# EAGLE board CEAZA_MEGA_V1.6 (EAGLE 9.5.2), part 1 of 2
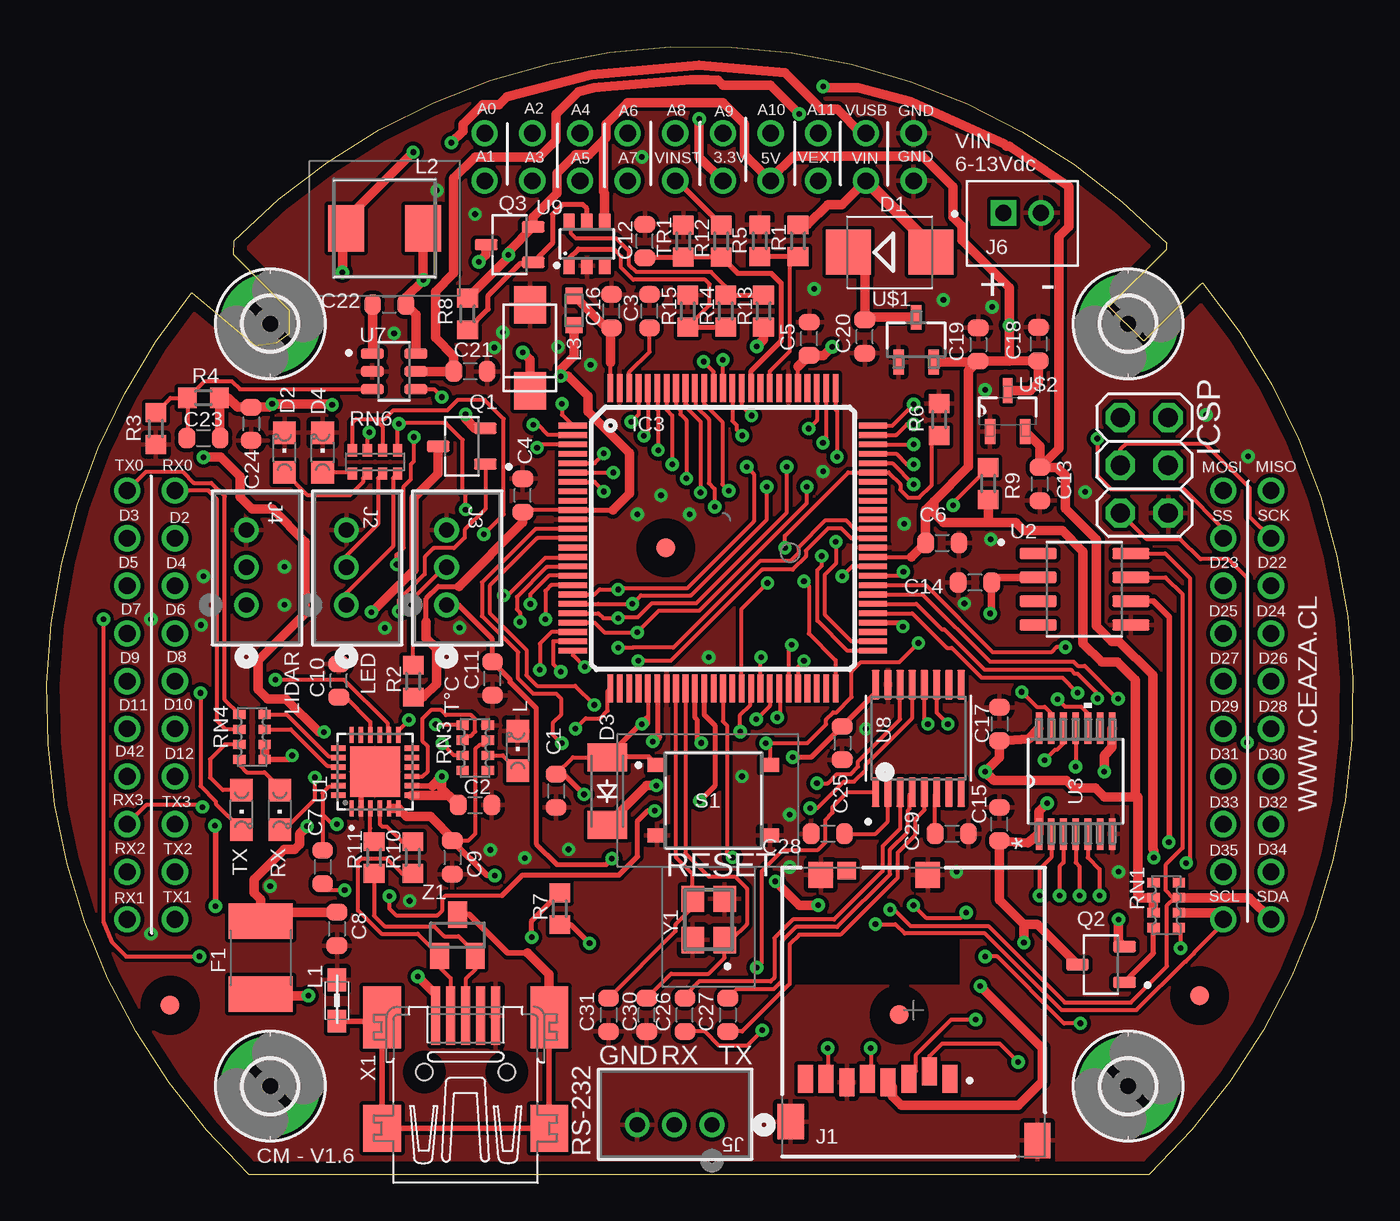
[diagram p0: board, top side]
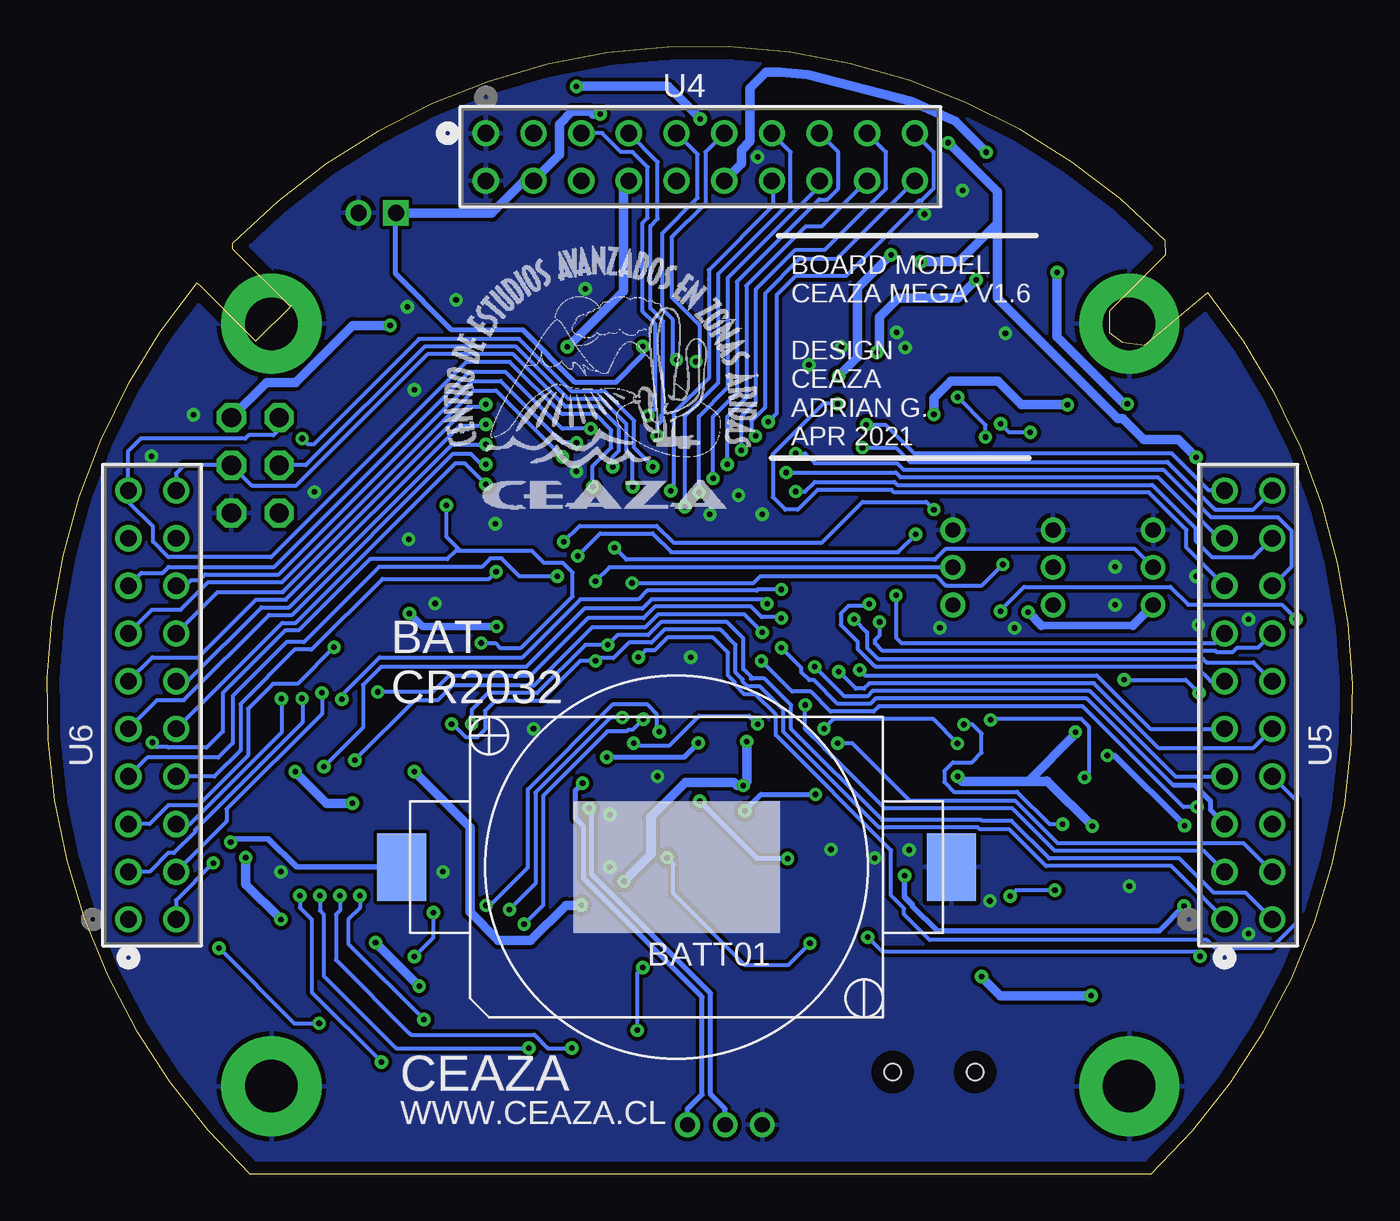
[diagram p1: board, bottom side, seen from below]

Size 69.59 x 60.07 mm. Coordinates in mm from the lower left corner, seen from the top.
Outline: 10.76,0 58.76,0 arc86 61.61,47.48 61.47,47.4 58.46,44.39 56.55,46.3 56.63,46.26 59.68,49.31 59.68,49.62 arc91 9.97,49.75 9.96,49 12.93,46.03 12.93,44.81 12.24,44.32 11.1,44.16 7.71,46.98 arc85 10.76,0
Copper layers (1*16): Top 0.035mm / dielectric 1.5mm / Bottom 0.035mm
Design rules "default *": minimum track width 8mil, minimum drill 16mil, track to track 7mil, track to pad 7mil, pad to pad 8mil, via to via 10mil, smd to smd 7mil, copper to edge 27mil, drill to drill 12mil, minimum pad ring 10mil, minimum via ring 8mil, stop-mask expansion 2mil, vias tented up to drill 24mil, thermal gap 10mil
Net classes: 0 default: width 0.203 mm, drill 0.406 mm, clearance 0.203 mm; 1 power: width 0.508 mm, drill 0.406 mm, clearance 0.203 mm; 2 gnd: width 0.305 mm, drill 0.406 mm, clearance 0.203 mm; 3 power usb: width 0.508 mm, drill 0.406 mm, clearance 0.203 mm

## Footprints (pad centres in the part's own frame; a part is rotated, then mirrored left to right if it is on the bottom)
KZH20SMD = smd 2.6 x 3.6: + 14.65,0; - -14.65,0
C0603-ROUND = smd 0.898 x 1.1: 1 -0.889,0; 2 0.889,0
SMB = smd 2.4 x 2.4: A 2.2,0; C -2.2,0
CHIPLED_0805 = smd 1.2 x 1.2: A 0,-1.05; C 0,1.05
SOD-123_MINI-SMA = smd 1.5 x 2.1: A 1.8,0; C -1.8,0
L1812 = smd 1.9 x 3.4: 1 -1.95,0; 2 1.95,0
FIDUCIA-MOUNT = smd 1.016 x 1.016: P$1 0,0
2,8-PAD = drill 2.8 pad 5.334: B2,8 0,0
TQFP100 = smd 1.5 x 0.3: 1 -8,6; 2 -8,5.5; 3 -8,5; 4 -8,4.5; 5 -8,4; 6 -8,3.5; 7 -8,3; 8 -8,2.5; 9 -8,2; 10 -8,1.5; 11 -8,1; 12 -8,0.5; 13 -8,0; 14 -8,-0.5; 15 -8,-1; 16 -8,-1.5; 17 -8,-2; 18 -8,-2.5; 19 -8,-3; 20 -8,-3.5; 21 -8,-4; 22 -8,-4.5; 23 -8,-5; 24 -8,-5.5; 25 -8,-6; 51 8,-6; 52 8,-5.5; 53 8,-5; 54 8,-4.5; 55 8,-4; 56 8,-3.5; 57 8,-3; 58 8,-2.5; 59 8,-2; 60 8,-1.5; 61 8,-1; 62 8,-0.5; 63 8,0; 64 8,0.5; 65 8,1; 66 8,1.5; 67 8,2; 68 8,2.5; 69 8,3; 70 8,3.5; 71 8,4; 72 8,4.5; 73 8,5; 74 8,5.5; 75 8,6 | smd 0.3 x 1.5: 26 -6,-8; 27 -5.5,-8; 28 -5,-8; 29 -4.5,-8; 30 -4,-8; 31 -3.5,-8; 32 -3,-8; 33 -2.5,-8; 34 -2,-8; 35 -1.5,-8; 36 -1,-8; 37 -0.5,-8; 38 0,-8; 39 0.5,-8; 40 1,-8; 41 1.5,-8; 42 2,-8; 43 2.5,-8; 44 3,-8; 45 3.5,-8; 46 4,-8; 47 4.5,-8; 48 5,-8; 49 5.5,-8; 50 6,-8; 76 6,8; 77 5.5,8; 78 5,8; 79 4.5,8; 80 4,8; 81 3.5,8; 82 3,8; 83 2.5,8; 84 2,8; 85 1.5,8; 86 1,8; 87 0.5,8; 88 0,8; 89 -0.5,8; 90 -1,8; 91 -1.5,8; 92 -2,8; 93 -2.5,8; 94 -3,8; 95 -3.5,8; 96 -4,8; 97 -4.5,8; 98 -5,8; 99 -5.5,8; 100 -6,8
2X03 = drill 1.016 pad 1.55 octagon: 1 -2.54,-1.27; 2 -2.54,1.27; 3 0,-1.27; 4 0,1.27; 5 2.54,-1.27; 6 2.54,1.27
GCT_MEM2051-00-195-00-A_REVC = smd 0.8 x 1.5: 1 1.94,-3.66; 2 0.84,-3.26; 3 -0.26,-3.66; 4 -1.36,-3.86; 5 -2.46,-3.66; 6 -3.56,-3.86; 7 -4.66,-3.66; 8 -5.76,-3.66 | smd 1 x 0.95: 9 -3.56,7.425 | smd 1.3 x 1.4: 10 -4.95,7.2; 11 0.75,7.2 | smd 1.4 x 1.9: 12 -6.55,-5.95; 13 6.6,-6.95
CONN_B3B-PH-K-S(LF)(SN)_JST = drill 0.813 pad 1.321: 1 0,0; 2 -2.007,0; 3 -3.988,0
JST_B2B-PH-K-S(LF)(SN) = drill 0.86 square: 1 1,-0.55 | drill 0.86: 2 -1,-0.55
0805 = smd 1.2 x 1: 1 -1.1,0; 2 1.1,0
MWSA0503 = smd 1.9 x 2.5: 1 -2.05,0; 2 2.05,0
INDC1608X90N = smd 0.87 x 0.93: 1 -0.78,0; 2 0.78,0
SOT95P280X125-3N = smd 1.21 x 0.59: 1 -1.255,0.95; 2 -1.255,-0.95; 3 1.255,0
R0603 = smd 1 x 1.1: 1 -0.85,0; 2 0.85,0
CAY16 = smd 0.5 x 0.65: 1 -1.2,-0.675; 2 -0.4,-0.675; 3 0.4,-0.675; 4 1.2,-0.675; 5 1.2,0.675; 6 0.4,0.675; 7 -0.4,0.675; 8 -1.2,0.675
0603-ARV = smd 0.5 x 0.65: 1 -1.2,-0.625; 2 -0.4,-0.625; 3 0.4,-0.625; 4 1.2,-0.625; 5 1.2,0.625; 6 0.4,0.625; 7 -0.4,0.625; 8 -1.2,0.625
TS1187ACGB = smd 1 x 0.75: A1 -3,1.875; B1 3,1.875; C1 -3,-1.875; D1 3,-1.875
QFN50P400X400X80-25N = smd 0.81 x 0.26: 1 -1.955,1.25; 2 -1.955,0.75; 3 -1.955,0.25; 4 -1.955,-0.25; 5 -1.955,-0.75; 6 -1.955,-1.25; 13 1.955,-1.25; 14 1.955,-0.75; 15 1.955,-0.25; 16 1.955,0.25; 17 1.955,0.75; 18 1.955,1.25 | smd 0.26 x 0.81: 7 -1.25,-1.955; 8 -0.75,-1.955; 9 -0.25,-1.955; 10 0.25,-1.955; 11 0.75,-1.955; 12 1.25,-1.955; 19 1.25,1.955; 20 0.75,1.955; 21 0.25,1.955; 22 -0.25,1.955; 23 -0.75,1.955; 24 -1.25,1.955 | smd 2.68 x 2.68: 25 0,0
SOIC127P600X175-8N = smd 1.97 x 0.59: 1 -2.475,1.905; 2 -2.475,0.635; 3 -2.475,-0.635; 4 -2.475,-1.905; 5 2.475,-1.905; 6 2.475,-0.635; 7 2.475,0.635; 8 2.475,1.905
PW14 = smd 1.676 x 0.356: 1 -2.819,1.95; 2 -2.819,1.3; 3 -2.819,0.65; 4 -2.819,0; 5 -2.819,-0.65; 6 -2.819,-1.3; 7 -2.819,-1.95; 8 2.819,-1.95; 9 2.819,-1.3; 10 2.819,-0.65; 11 2.819,0; 12 2.819,0.65; 13 2.819,1.3; 14 2.819,1.95
1-215307-0 = drill 0.889 pad 1.397: 1 -22.86,2.54; 2 -20.32,2.54; 3 -17.78,2.54; 4 -15.24,2.54; 5 -12.7,2.54; 6 -10.16,2.54; 7 -7.62,2.54; 8 -5.08,2.54; 9 -2.54,2.54; 10 0,2.54; 11 0,0; 12 -2.54,0; 13 -5.08,0; 14 -7.62,0; 15 -10.16,0; 16 -12.7,0; 17 -15.24,0; 18 -17.78,0; 19 -20.32,0; 20 -22.86,0
SOT95P275X110-6N = smd 1.24 x 0.55: 1 -1.16,0.95; 2 -1.16,0; 3 -1.16,-0.95; 4 1.16,-0.95; 5 1.16,0; 6 1.16,0.95
SOP65P640X120-16N = smd 1.57 x 0.41: 1 -2.87,2.275; 2 -2.87,1.625; 3 -2.87,0.975; 4 -2.87,0.325; 5 -2.87,-0.325; 6 -2.87,-0.975; 7 -2.87,-1.625; 8 -2.87,-2.275; 9 2.87,-2.275; 10 2.87,-1.625; 11 2.87,-0.975; 12 2.87,-0.325; 13 2.87,0.325; 14 2.87,0.975; 15 2.87,1.625; 16 2.87,2.275
SOT23-6 = smd 0.6 x 0.9: 1 -0.95,-1.15; 2 0,-1.15; 3 0.95,-1.15; 4 0.95,1.15; 5 0,1.15; 6 -0.95,1.15
SOT95P255X145-3N = smd 0.559 x 1.321: 1 -0.94,-1.194; 2 0.94,-1.194; 3 0,1.194
SOT95P237X112-3N = smd 1.321 x 0.559: 1 -1.092,0.94; 2 -1.092,-0.94 | smd 1.321 x 0.508: 3 1.092,0
SMA-SS34 = smd 2 x 1.7: 1 0,-1.4; 2 4.6,-1.4
32005-201 = smd 3.1 x 0.5: 1 3,1.6; 2 3,0.8; 3 3,0; 4 3,-0.8; 5 3,-1.6 | smd 2.5 x 2: M1 -3,-4.45; M2 -3,4.45 | smd 3.3 x 2: M3 2.9,4.45; M4 2.9,-4.45 | hole 0.9: 0,2.2; 0,-2.2
X322516MLB4SI = smd 1.4 x 1.2: 1 -1.1,-0.85; 2 1.1,-0.85; 3 1.1,0.85; 4 -1.1,0.85
SOT23 = smd 1 x 1.4: 1 -0.95,-1.1; 2 0.95,-1.1; 3 0,1.1

## Placement (x,y rotation side)
BATT01  2032  [KZH20SMD]  36.03,16.36 180 bottom
C1  22p  [C0603-ROUND]  27.14,20.43 270 top
C2  100nF  [C0603-ROUND]  22.82,19.67 0 top
C3  100nF  [C0603-ROUND]  32.12,45.99 90 top
C4  100nF  [C0603-ROUND]  25.36,36.18 90 top
C5  100nF  [C0603-ROUND]  40.63,44.52 90 top
C6  100nF  [C0603-ROUND]  47.71,33.64 0 top
C7  100nF  [C0603-ROUND]  14.69,16.36 270 top
C8  100nF  [C0603-ROUND]  15.46,13.06 270 top
C9  100nF  [C0603-ROUND]  21.6,16.87 270 top
C10  100nF  [C0603-ROUND]  15.56,26.3 90 top
C11  100nF  [C0603-ROUND]  23.75,26.41 90 top
C12  100nF  [C0603-ROUND]  31.86,49.73 90 top
C13  1uF  [C0603-ROUND]  52.92,36.77 90 top
C14  100nF  [C0603-ROUND]  49.45,31.53 180 top
C15  100nF  [C0603-ROUND]  50.76,18.65 90 top
C16  100nF  [C0603-ROUND]  30.09,45.99 90 top
C17  100nF  [C0603-ROUND]  50.76,23.98 270 top
C18  1uF  [C0603-ROUND]  52.85,44.24 270 top
C19  1uF  [C0603-ROUND]  49.63,44.22 270 top
C20  1uF  [C0603-ROUND]  43.59,44.63 90 top
C21  4.7uF  [C0603-ROUND]  22.57,42.78 0 top
C22  100nF  [C0603-ROUND]  18.25,46.34 0 top
C23  33pF  [C0603-ROUND]  8.34,39.22 0 top
C24  10uF  [C0603-ROUND]  10.88,39.99 270 top
C25  100nF  [C0603-ROUND]  42.38,22.97 270 top
C26  100nF  [C0603-ROUND]  34,8.49 90 top
C27  100nF  [C0603-ROUND]  36.28,8.49 270 top
C28  100nF  [C0603-ROUND]  41.62,18.14 180 top
C29  100nF  [C0603-ROUND]  48.22,18.14 0 top
C30  22pF  [C0603-ROUND]  31.97,8.49 90 top
C31  22pF  [C0603-ROUND]  29.93,8.49 270 top
D1  M7  [SMB]  44.92,49.13 0 top
D2  Green  [CHIPLED_0805]  12.66,38.46 0 top
D3  1N4148W  [SOD-123_MINI-SMA]  29.86,20.41 90 top
D4  Red  [CHIPLED_0805]  14.69,38.46 0 top
F1  MF-MSMF050-2 500mA  [L1812]  11.39,11.54 270 top
FD1  FIDUCIALMOUNT  [FIDUCIA-MOUNT]  61.43,9.51 0 top
FD2  FIDUCIALMOUNT  [FIDUCIA-MOUNT]  6.57,9 0 top
FD3  FIDUCIALMOUNT  [FIDUCIA-MOUNT]  45.43,8.49 0 top
FD4  FIDUCIALMOUNT  [FIDUCIA-MOUNT]  32.98,33.38 0 top
H5  MOUNT-PAD-ROUND2.8  [2,8-PAD]  57.62,45.32 0 top
H6  MOUNT-PAD-ROUND2.8  [2,8-PAD]  11.9,45.32 0 top
H7  MOUNT-PAD-ROUND2.8  [2,8-PAD]  11.9,4.68 0 top
H8  MOUNT-PAD-ROUND2.8  [2,8-PAD]  57.62,4.68 0 top
IC3  ATMEGA2560-15AU  [TQFP100]  36.03,33.89 0 top
ICSP  ICSP  [2X03]  58.48,37.78 270 top
J1  MEM2051-00-195-00-A_REVC  [GCT_MEM2051-00-195-00-A_REVC]  46.19,8.74 0 top
J2  B3B-PH-K-S(LF)(SN)  [CONN_B3B-PH-K-S(LF)(SN)_JST]  15.96,30.33 270 top
J3  B3B-PH-K-S(LF)(SN)  [CONN_B3B-PH-K-S(LF)(SN)_JST]  21.3,30.33 270 top
J4  B3B-PH-K-S(LF)(SN)  [CONN_B3B-PH-K-S(LF)(SN)_JST]  10.63,30.33 270 top
J5  B3B-PH-K-S(LF)(SN)  [CONN_B3B-PH-K-S(LF)(SN)_JST]  35.45,2.62 0 top
J6  B2B-PH-K-S(LF)(SN)  [JST_B2B-PH-K-S(LF)(SN)]  51.98,50.68 180 top
L  Yellow  [CHIPLED_0805]  25.1,22.56 0 top
L1  MH2029-300Y  [0805]  15.46,9.25 270 top
L2  MWSA0503-4R7MT  [MWSA0503]  18,50.4 180 top
L3  10uH  [INDC1608X90N]  28.09,46.03 270 top
Q1  AO3407A  [SOT95P280X125-3N]  22.11,38.79 180 top
Q2  AO3407A  [SOT95P280X125-3N]  56.17,11.17 180 top
Q3  AO3407A  [SOT95P280X125-3N]  24.66,49.54 180 top
R1  1M  [R0603]  40.03,49.74 270 top
R2  4.7k  [R0603]  19.52,26.27 270 top
R3  22K  [R0603]  5.8,39.73 270 top
R4  120K  [R0603]  8.34,41.37 0 top
R5  470K  [R0603]  37.99,49.74 90 top
R6  1k  [R0603]  47.55,40.21 270 top
R7  10K  [R0603]  27.33,14.14 90 top
R8  1M  [R0603]  22.42,45.84 90 top
R9  10K  [R0603]  50.17,36.8 270 top
R10  22R  [R0603]  19.5,16.87 90 top
R11  22R  [R0603]  17.44,16.87 90 top
R12  10k  [R0603]  35.94,49.73 270 top
R13  1M  [R0603]  38.19,45.99 270 top
R14  100K  [R0603]  36.17,45.99 90 top
R15  270K  [R0603]  34.15,45.99 270 top
RN1  10k  [CAY16]  59.65,14.33 90 top
RN3  4.7K  [CAY16]  22.82,22.71 90 top
RN4  1K  [CAY16]  10.94,23.3 270 top
RN6  1K  [0603-ARV]  17.49,37.95 180 top
RX  Blue  [CHIPLED_0805]  12.41,19.41 180 top
S1  TS-1187A-C-G-B  [TS1187ACGB]  35.52,19.92 0 top
TR1  [R0603]  33.92,49.73 90 top
TX  Orange  [CHIPLED_0805]  10.38,19.41 180 top
U1  CP2104-F03-GM  [QFN50P400X400X80-25N]  17.49,21.44 90 top
U2  DS3231MZ+  [SOIC127P600X175-8N]  55.3,31.17 0 top
U3  TXB0104PWR  [PW14]  54.83,20.94 90 top
U4  1-215307-0  [1-215307-0]  23.33,52.94 0 bottom
U5  1-215307-0  [1-215307-0]  4.28,36.43 90 bottom
U6  1-215307-0  [1-215307-0]  62.7,36.43 90 bottom
U7  MP2451DT-LF-Z  [SOT95P275X110-6N]  18.5,42.78 0 top
U8  SP3232EEY-LT/TLSMD  [SOP65P640X120-16N]  46.44,23.22 90 top
U9  CN305  [SOT23-6]  28.78,49.57 0 top
U$1  MCP1702T-5002E/CB  [SOT95P255X145-3N]  46.33,44.47 0 top
U$2  MCP1700T-3302E/TT  [SOT95P237X112-3N]  51.21,40.66 90 top
U$3  SMA-SS34  [SMA-SS34]  27.14,46.34 270 top
X1  MINI-USB-SCHIELD-32005-201  [32005-201]  22.31,5.44 90 top
Y1  X322516MLB4SI  [X322516MLB4SI]  35.27,13.57 90 top
Z1  PSM712-LF-T7  [SOT23]  21.88,12.73 0 top

## Library data of the parts
BATT01 = kzh20_lithium_batterie_holder
C1 C24 = Condensatori; CASE: 0603; MONTHLY_USAGE: _____; PART_NUMBER: 22pF_0603; PRICE: _____; SUPPLIER: _____; TYPE: Condensatori
C2-C12 C14-C17 C21-C23 C25-C31 = Condensatori; CASE: 0603; MONTHLY_USAGE: _____; PART_NUMBER: cl10b104kbnc; PRICE: _____; SUPPLIER: _____; TYPE: Condensatori
C13 C18-C20 = Condensatori; CASE: 0603; MONTHLY_USAGE: _____; PART_NUMBER: 1uF_0603/GRM188R61E105KA12D; PRICE: _____; SUPPLIER: _____; TYPE: Condensatori
D1 = Diodi; CASE: SMA; MONTHLY_USAGE: _____; PART_NUMBER: M7; PRICE: _____; SUPPLIER: _____; TYPE: Diodi
D2 D4 = Opto; MONTHLY_USAGE: _____; PART_NUMBER: KPT-2012SGC; PRICE: _____; SUPPLIER: _____; TYPE: Opto
D3 = diode
F1 = Protezione; MONTHLY_USAGE: _____; PART_NUMBER: MF-MSMF050-2; PRICE: _____; SUPPLIER: _____; TYPE: Protezione
FD1-FD4 = SmartPrj
H5-H8 = holes
IC3 = IntegratedCircuits; CASE: TQFP100_14x14; MONTHLY_USAGE: _____; PART_NUMBER: ATMEGA2560-16AU; PRICE: _____; SUPPLIER: _____; TYPE: Circuito_Integrato
ICSP = Connettori; MONTHLY_USAGE: _____; PART_NUMBER: PH254-203DF118A00V; PRICE: _____; SUPPLIER: _____; TYPE: Connettori
J1 = MEM2051-00-195-00-A_REVC; DESCRIPTION: 9 _8 + 1_ Position Card Connector microSD™ Surface Mount, Right Angle Gold; DIGI-KEY_PART_NUMBER: 2073-MEM2051-00-195-00-ACT-ND; DIGI-KEY_PURCHASE_URL: https://www.digikey.com/product-detail/en/gct/MEM2051-00-195-00-A/2073-MEM2051-00-195-00-ACT-ND/9859682?utm_source=snapeda&utm_medium=aggregator&utm_campaign=symbol; MF: Global Connector Technology; MP: MEM2051-00-195-00-A; PACKAGE: None
J2-J5 = B3B-PH-K-S(LF)(SN); BUILT_BY: EMA_Cory; COPYRIGHT: Copyright (C) 2018 Accelerated Designs. All rights reserved; MANUFACTURER_PART_NUMBER: B3B-PH-K-S(LF)(SN); SOURCELIBRARY: JST_2019-12-02; VENDOR: JST
J6 = B2B-PH-K-S_LF__SN_; ARROW_ELECTRONICS-PURCHASE-URL: https://snapeda.com/shop?store=Arrow+Electronics&id=424103; DESCRIPTION: Connector Header Through Hole 2 position 0.079 (2.00mm); DIGI-KEY_PART_NUMBER: 455-1704-ND; DIGIKEY-PURCHASE-URL: https://snapeda.com/shop?store=DigiKey&id=424103; MF: JST Sales; MP: B2B-PH-K-S(LF)(SN); PACKAGE: None
L RX TX = Opto; MONTHLY_USAGE: _____; PART_NUMBER: KPT-2012YC; PRICE: _____; SUPPLIER: _____; TYPE: Opto
L1 = Protezione; MONTHLY_USAGE: _____; PART_NUMBER: BLM21PG300SN1D_/_MH2029-300Y; PRICE: _____; SUPPLIER: _____; TYPE: Protezione
L2 = MWSA0503; DESCRIPTION: Molded power inductors; HEIGHT: 3mm; MANUFACTURER_NAME: SUNLORD; MANUFACTURER_PART_NUMBER: MWSA0503
L3 = LQM18FN100M00D; DESCRIPTION: Inductor with Inductance: 10uH Tol. +/-20%, Package: 0603 (1608); DIGI-KEY_PART_NUMBER: 490-4025-1-ND; DIGIKEY-PURCHASE-URL: https://snapeda.com/shop?store=DigiKey&id=105861; MF: Murata Electronics; MOUSER-PURCHASE-URL: https://snapeda.com/shop?store=Mouser&id=105861; MP: LQM18FN100M00D; PACKAGE: 1608 Murata
Q1-Q3 = AO3407A; DESCRIPTION: P-Channel 30V 4.3A (Ta) 1.4W (Ta) Surface Mount SOT-23-3L; DIGI-KEY_PART_NUMBER: 785-1006-1-ND; DIGIKEY-PURCHASE-URL: https://snapeda.com/shop?store=DigiKey&id=547767; MF: Alpha &; MP: AO3407A; PACKAGE: SOT-23 Alpha &amp; Omega Semiconductor
R1-R15 TR1 = rcl; SPICEPREFIX: R
RN1 = Resistenze; CASE: SMD_3,2x1,6; MONTHLY_USAGE: _____; PART_NUMBER: 064R_10K_/_CAY16-103J4LF; PRICE: _____; SUPPLIER: _____; TYPE: Resistenze
RN3 RN4 = Resistenze; CASE: SMD_3,2x1,6; MONTHLY_USAGE: _____; PART_NUMBER: 064R_1K_/_CAY16-102J4LF; PRICE: _____; SUPPLIER: _____; TYPE: Resistenze
RN6 = resistor-dil; OC_FARNELL: unknown; OC_NEWARK: unknown
S1 = TS-1187A-C-G-B; DESCRIPTION: Tact Switch; HEIGHT: 3.7mm; MANUFACTURER_NAME: XKB Enterprise; MANUFACTURER_PART_NUMBER: TS-1187A-C-G-B
U1 = CP2104; AVAILABILITY: Unavailable; DESCRIPTION: USB Bridge, USB to UART USB 2.0 UART Interface 24-QFN _4x4_; MF: Silicon Labs; MP: CP2104; PACKAGE: QFN-24 Silicon Labs; PRICE: None
U2 = DS3231MZ_; DESCRIPTION: Real Time Clock _RTC_ IC Clock/Calendar I²C, 2-Wire Serial 8-SOIC _0.154, 3.90mm Width_; DIGI-KEY_PART_NUMBER: DS3231MZ+-ND; DIGI-KEY_PURCHASE_URL: https://www.digikey.com/product-detail/en/maxim-integrated/DS3231MZ-/DS3231MZ--ND/2754396?utm_source=snapeda&utm_medium=aggregator&utm_campaign=symbol; MF: Maxim Integrated; MP: DS3231MZ+; PACKAGE: SOIC-8 Maxim
U3 = TXB0104PWRPW14-L; DATASHEET_URL: http://www.ti.com/lit/gpn/TXB0104; DESCRIPTION: 4-Bit Bidirectional Voltage-Level Translator with Auto Direction Sensing and +/-15 kV ESD Protect; FAMILY_NAME: AUTO DIRECTION SENSING DUAL SUPPLY TRANSLATOR; GENERIC_PART_NUMBER: TXB0104; INDUSTRY_STD_PKG_TYPE: TSSOP; MANUFACTURER: Texas Instruments; MANUFACTURER_PART_NUMBER: TXB0104PWR; PACKAGE_DESIGNATOR: PW; PIN_COUNT: 14; VENDOR: Texas Instruments
U4-U6 = 1-215307-0; BUILT_BY: EMA_UL_Team; MANUFACTURER_PART_NUMBER: 1-215307-0; VENDOR: TE Connectivity
U7 = SOT95P275X110-6N
U8 = SOP65P640X120-16N
U9 = CN305; LCSC_PART#: C177763
U$1 = MCP1702T-5002E_CB; AVAILABILITY: Unavailable; DESCRIPTION: MCP1702 Series 250 mA 5.0 V LDO Positive Voltage Regulator - SOT-23; MF: Microchip; MP: MCP1702T-5002E/CB; PACKAGE: SOT-23-3 Microchip; PRICE: None
U$2 = MCP1700T-3302E_TT; AVAILABILITY: Unavailable; DESCRIPTION: Linear Voltage Regulator IC Positive Fixed 1 Output 250mA SOT-23-3; MF: Microchip; MP: MCP1700T-3302E/TT; PACKAGE: SOT-23-3 Microchip; PRICE: None
U$3 = SMA-SS34
X1 = con-cypressindustries; OC_FARNELL: unknown; OC_NEWARK: unknown
Y1 = X322516MLB4SI; DESCRIPTION: Crystal; HEIGHT: 0.8mm; MANUFACTURER_NAME: Yangxing Tech; MANUFACTURER_PART_NUMBER: X322516MLB4SI
Z1 = PSM712-LF-T7

## Nets
+3V3 [power]: C13.2 Q2.2 U4.16 U$2.2
+5V [power]: C4.1 C5.1 C6.1 C17.2 C18.2 C19.2 D3.C IC3.10 IC3.31 IC3.61 IC3.80 ICSP.2 L3.2 Q3.2 R2.2 R8.2 R9.2 RN1.6 RN1.7 U3.14 U4.17 U9.4 U$1.2 U$2.3
A0: IC3.97 U4.10
A1: IC3.96 U4.11
A2: IC3.95 U4.9
A3: IC3.94 U4.12
A4: IC3.93 U4.8
A5: IC3.92 U4.13
A6: IC3.91 U4.7
A7: IC3.90 U4.14
A8: IC3.89 U4.6
A9: IC3.88 U4.5
A10: IC3.87 U4.4
A11: IC3.86 U4.3
A12: C12.1 IC3.85 R12.2 TR1.1
A13: IC3.84
A14: IC3.83 R1.2 R5.1
A15: IC3.82
AREF: C3.1 IC3.98
AVCC [power]: C16.1 IC3.100 L3.1
D2: IC3.6 U5.9
D3: IC3.7 U5.12
D4: IC3.1 U5.8
D5: IC3.5 U5.13
D6: IC3.15 U5.7
D7: IC3.16 U5.14
D8: IC3.17 U5.6
D9: IC3.18 U5.15
D10: IC3.23 U5.5
D11: IC3.24 U5.16
D12: IC3.25 U5.4
D13: IC3.26 RN3.7
D22: IC3.78 U6.8
D23: IC3.77 U6.13
D24: IC3.76 U6.7
D25: IC3.75 U6.14
D26: IC3.74 U6.6
D27: IC3.73 U6.15
D28: IC3.72 U6.5
D29: IC3.71 U6.16
D30: IC3.60 U6.4
D31: IC3.59 U6.17
D32: IC3.58 U6.3
D33: IC3.57 U6.18
D34: IC3.56 U6.2
D35: IC3.55 U6.19
D36: C14.1 IC3.54 U2.2
D37: IC3.53
D38: IC3.50 J3.2 R2.1
D39: IC3.70 J4.2 R6.2
D40: IC3.52 RN6.1 RN6.3
D41: IC3.51 RN6.2 RN6.4
D42: IC3.42 U5.17
D43: IC3.41 RN1.1
D44: IC3.40 U7.4
D45: IC3.39
D46: IC3.38 R7.1
D47: IC3.37
D48: C11.2 IC3.36 J3.1
D49: C25.1 IC3.35 U8.16
D+: R11.1 X1.3 Z1.2
D-: R10.1 X1.2 Z1.1
DTR: C7.1 RN3.5 U1.23
GND [gnd]: BATT01.- C1.2 C2.2 C3.2 C4.2 C5.2 C6.2 C8.2 C9.2 C10.2 C11.1 C12.2 C13.1 C14.2 C15.2 C16.2 C17.1 C18.1 C19.1 C20.1 C21.2 C24.2 C25.2 C28.2 C29.2 C30.1 C31.2 D2.C D4.C H5.B2,8 H6.B2,8 H7.B2,8 H8.B2,8 IC3.11 IC3.32 IC3.62 IC3.81 IC3.99 ICSP.6 J1.6 J1.10 J1.11 J1.12 J1.13 J2.3 J3.3 J4.3 J5.3 J6.2 L1.1 L.C R3.2 R5.2 R6.1 R15.1 RN3.4 S1.C1 S1.D1 TR1.2 U1.2 U1.25 U2.5 U3.7 U4.1 U4.20 U7.2 U8.15 U9.2 U$1.1 U$2.1 U$3.1 X1.5 Y1.2 Y1.4
M8RXD: RN4.7 U1.21
M8TXD: RN4.8 U1.20
MISO: IC3.22 ICSP.1 U3.12 U6.10
MISO3V3: J1.7 U3.3
MOSI: IC3.21 ICSP.4 U3.13 U6.11
MOSI3V3: J1.3 U3.2
N$1: C20.2 D1.C U$1.3
N$2: L.A RN3.2
N$3: D2.A RN6.6
N$4: RN3.6 U1.9
N$5: C10.1 U1.16
N$6: BATT01.+ U2.6
N$7: J2.1 RN6.8
N$8: J2.2 RN6.7
N$9: C22.2 L2.1 U7.6 U$3.2
N$10: C22.1 U7.1
N$11: D4.A RN6.5
N$12: C23.1 R3.1 R4.1 U7.3
N$13: C26.1 U8.1
N$14: C26.2 U8.3
N$15: C27.1 U8.4
N$16: C27.2 U8.5
N$17: C28.1 U8.2
N$18: Q2.1 RN1.8
N$19: C29.1 U8.6
N$20: Q1.1 R7.2
N$21: Q3.1 R8.1 U9.5
N$22: RN4.3 TX.A
N$23: RN4.4 RX.A
N$24: R13.1 R14.2 U9.6
N$25: R14.1 R15.2 U9.1
RD+: R11.2 U1.3
RD-: R10.2 U1.4
RESET: C1.1 C7.2 D3.A IC3.30 ICSP.5 R9.1 S1.A1 S1.B1
RX0: IC3.2 RN4.2 U5.10
RX1: IC3.45 U5.20 U8.12
RX2: IC3.12 U5.19
RX3: IC3.63 U5.18
RX232: J5.2 U8.13
RX-LED: RX.C U1.13
SCK: IC3.20 ICSP.3 U3.11 U6.9
SCK3V3: J1.5 U3.4
SCL: IC3.43 RN1.2 U2.8 U6.20
SDA: IC3.44 RN1.3 U2.7 U6.1
SS: IC3.19 U3.10 U6.12
SS3V3: J1.2 U3.5
TX0: IC3.3 RN4.1 U5.11
TX1: IC3.46 U5.1 U8.11
TX2: IC3.13 U5.2
TX3: IC3.64 U5.3
TX232: J5.1 U8.14
TX-LED: TX.C U1.14
USBVCC [power usb]: C2.1 C8.1 F1.1 Q3.3 U1.7 U1.8 U4.2
USHIELD [gnd]: L1.2 X1.M1 X1.M2 X1.M3 X1.M4 Z1.3
VEXT: U4.18
VIN [power]: C21.1 D1.A J6.1 R1.1 R13.2 U4.19 U7.5
VINSTR: C23.2 C24.1 L2.2 Q1.2 R4.2 R12.1 U4.15
VIO: C9.1 RN3.3 RN4.5 RN4.6 U1.5 U1.6
VLIDAR: J4.1 Q1.3
VSD [power]: C15.1 J1.4 Q2.3 U3.1 U3.8
XTAL1: C30.2 IC3.34 Y1.1
XTAL2: C31.1 IC3.33 Y1.3
XVCC [power usb]: F1.2 X1.1